# Altium PCB 自控开板V1.PcbDoc
Units mil, origin at the board's own origin, x right, y up, seen from the top; angles counter-clockwise.
Board outline 6000 x 4000 mil, 2 copper layers (Top Layer, Bottom Layer); 103 components, 0 nets, 412 pads, 146 vias.
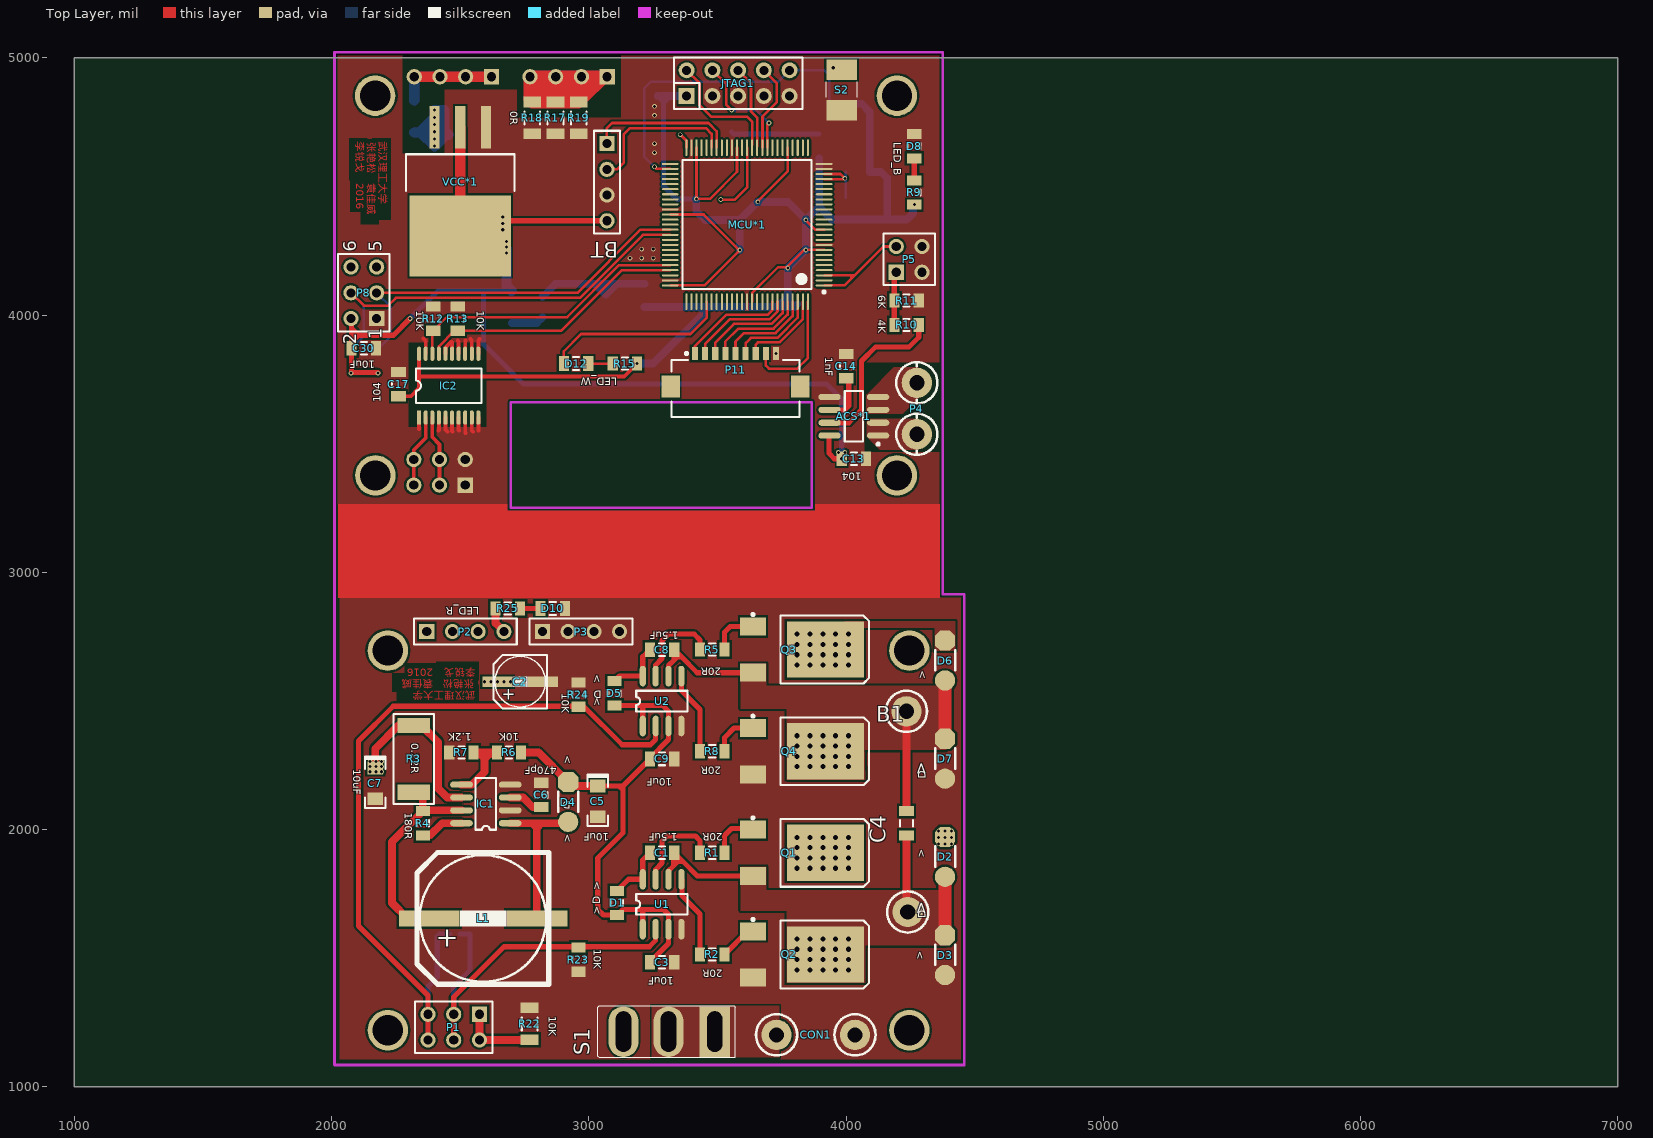
[diagram p0: Top Layer view]
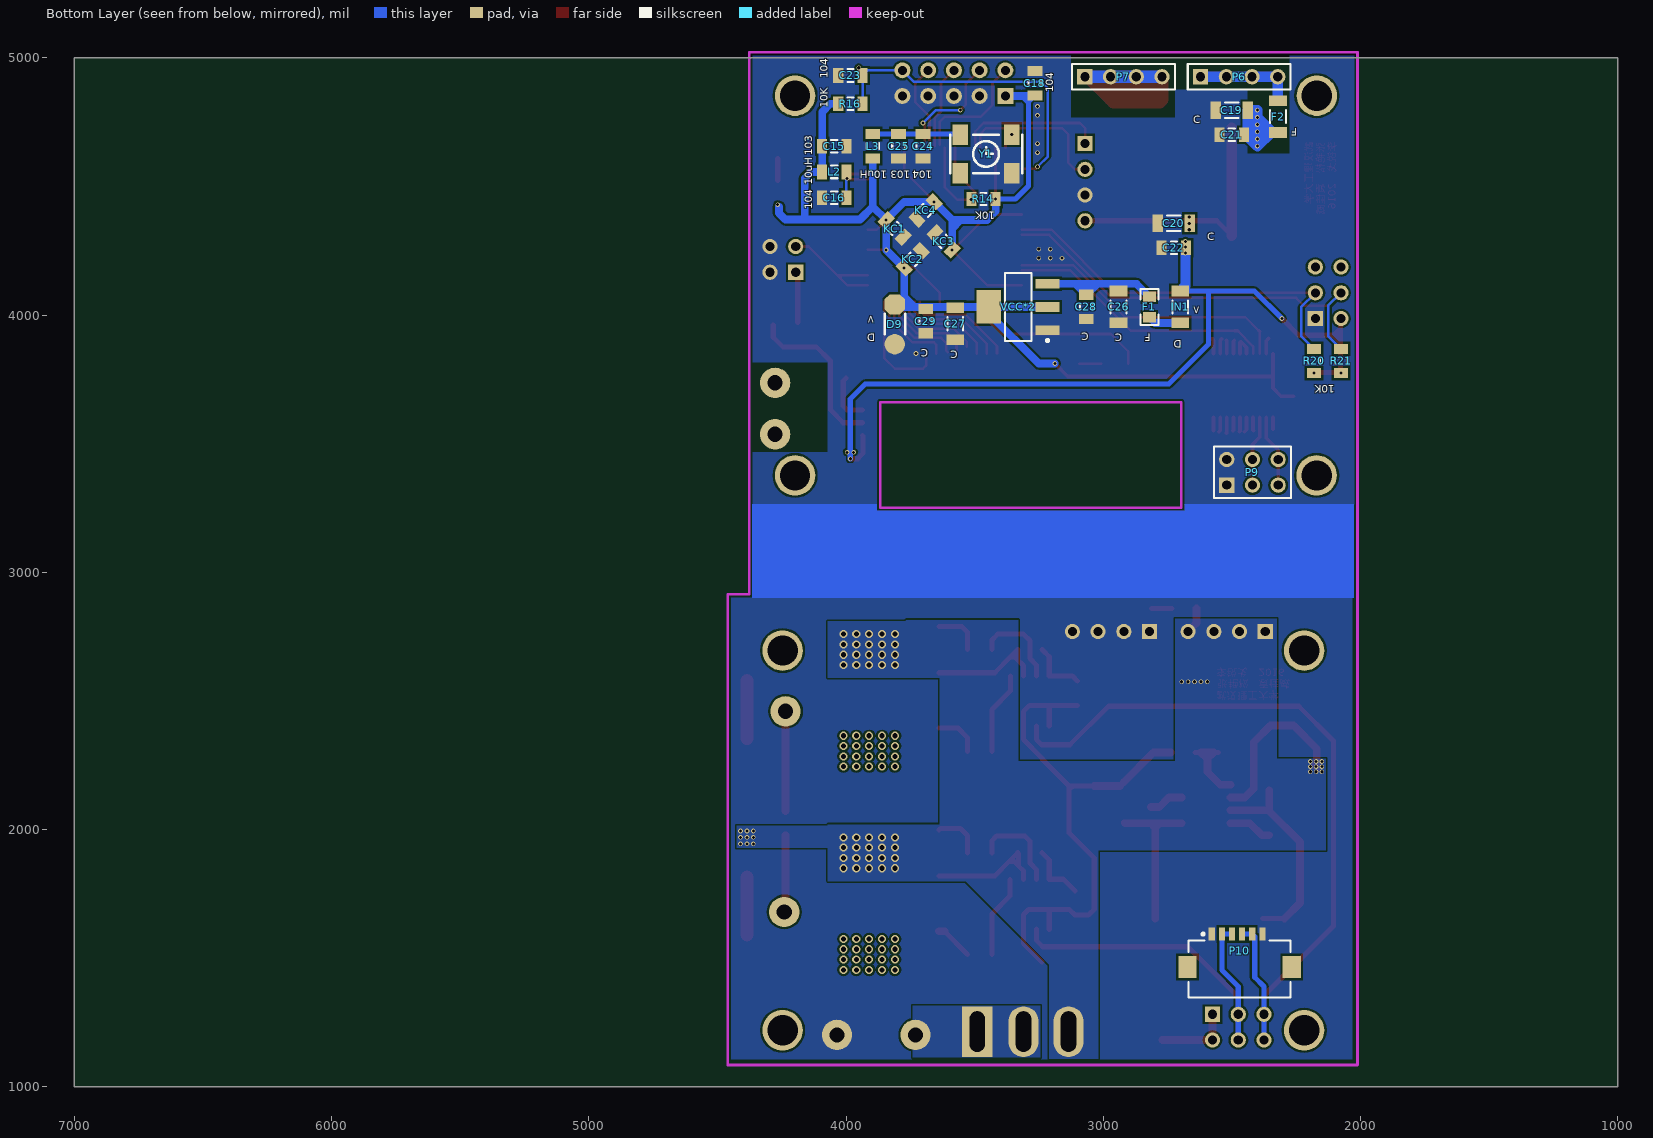
[diagram p1: Bottom Layer view, seen from below]

## Layer stack, top to bottom
Top Layer: signal copper 1.4
Dielectric: dielectric 12.6, FR-4, Dk 4.8
Bottom Layer: signal copper 1.4

## Board outline
1000,1000 7000,1000 7000,5000 1000,5000

## Design rules (kind name [scope] priority, off if disabled: settings)
Clearance [All] p1: gap=10
PolygonConnect [All] p1: connectstyle=Relief reliefconductorwidth=10 reliefentries=4 polygonreliefangle="90 Angle" airgapwidth=10
RoutingVias [All] p1: holewidth=28 width=50 viastyle="Through Hole" minholewidth=28 minwidth=50 maxholewidth=28 maxwidth=50
SolderMaskExpansion [All] p1: expansion=4
Width [All] p1: maxlimit=10 minlimit=10 preferedwidth=10
28 further rules are at their usual default settings.

## Components (designator, comment, footprint, x,y, rotation, side; value= is the part's Value field where it differs from the comment)
ACS*1 "ACS712 AMPSENSOR" "SOIC1-8N ACS712" 4030.55,3607.01 r180 top
B1 "Motor" KF301-2P#1 4235,2185 r0 top
BT "Header 4" HDR1X4 3070.55,4667.01 r270 top
C1 "CAP" C2012 3285,1910 r180 top
C2 "Cap" SMD-EC-F5 2645,2575 r0 top
C3 "Cap Pol1" C2012 3285,1485 r0 top
C4 "Cap" C2012 4235,2025 r90 top
C5 "Cap Pol1" 1206C 3035,2110 r90 top
C6 "Cap" C2012 2815,2135 r270 top
C7 "Cap Pol1" 1206C 2170,2180 r90 top
C8 "Cap" C2012 3285,2700 r180 top
C9 "Cap Pol1" C2012 3285,2275 r0 top
C13 "Cap" C2012 4030.55,3442.01 r180 top
C14 "Cap" C2012 4000.55,3802.01 r90 top
C15 "100nF" C2012 4045.55,4657.01 r0 bottom
C16 "10nF" C2012 4045.55,4457.01 r180 bottom
C17 "100nF" C2012 2260.55,3732.01 r90 top
C18 "100nF" C2012 3265.55,4902.01 r90 bottom
C19 "Cap Pol1" 1206(2) 2500.55,4797.01 r0 bottom
C20 "Cap Pol1" 1206(2) 2725.55,4357.01 r0 bottom
C21 "Cap" C2012 2500.55,4702.01 r180 bottom
C22 "Cap" C2012 2725.55,4262.01 r180 bottom
C23 "100nF" C2012 3982.8,4932.01 r180 bottom
C24 "10nF" C2012 3700.55,4657.01 r90 bottom
C25 "100nF" C2012 3795.55,4657.01 r90 bottom
C26 "Cap Pol1" 1206(2) 2940.55,4032.01 r270 bottom
C27 "Cap Pol1" 1206(2) 3575.55,3967.01 r270 bottom
C28 "Cap" C2012 3065.55,4032.01 r90 bottom
C29 "Cap" C2012 3690.55,3977.01 r90 bottom
C30 "Cap Pol1" C2012 2125.55,3872.01 r0 top
CON1 "PowerIn" KF301-2P#2 3880,1202.2 r90 top
D1 "S4" R2012 3110,1715 r90 top
D2 "SS14" "hole-chip diode" 4425,1816.67 r90 top
D3 "SS14" "hole-chip diode" 4425,1435 r90 top
D4 "SS14" "hole-chip diode" 2960,2030 r90 top
D5 "S4" R2012 3100,2530 r90 top
D6 "SS14" "hole-chip diode" 4425,2580 r90 top
D7 "SS14" "hole-chip diode" 4425,2198.33 r90 top
D8 "POWER" C2012 4265.55,4657.01 r90 top
D9 "1N4729A" "hole-chip diode" 3770.55,3887.01 r90 bottom
D10 "POWER" C2012 2860,2860 r0 top
D12 "POWER" C2012 2950.55,3812.01 r180 top
F1 "300mA" 0805(2012) 2820.55,4032.01 r270 bottom
F2 "500mA" 1206(2) 2320.55,4772.01 r270 bottom
IC1 "MC34063" MC34063 2600,2100 r180 top
IC2 "74LVC245" "74LVC245 TSSOP" 2340.55,3602.01 r90 top
IN1 "1SS355" 1206(2) 2700.55,4032.01 r270 bottom
JTAG1 "Header 5X2" IDC5X2 3580.55,4902.01 r0 top
KC1 "100nF" C2012 3810.55,4337.01 r45 bottom
KC2 "100nF" C2012 3740.55,4217.01 r315 bottom
KC3 "100nF" C2012 3620.55,4287.01 r225 bottom
KC4 "100nF" C2012 3690.55,4407.01 r135 bottom
L1 "Inductor" SMD-EC-F12.5 2380,1655 r0 top
L2 "Inductor" C2012 4045.55,4557.01 r180 bottom
L3 "Inductor" C2012 3895.55,4657.01 r90 bottom
MCU*1 "k60P100" LQFP100 3615.55,4352.01 r180 top
P1 "Header 3X2" HDR2X3 2575,1282.2 r180 top
P2 "Header 4" HDR1X4 2370,2770 r0 top
P3 "Header 4" HDR1X4 2820,2770 r0 top
P4 "Header 2" KF301-2P#3 4275.55,3637.01 r180 top
P5 "Header 2X2" HDR2X2 4195.55,4167.01 r0 top
P6 "Header 4" HDR1X4 2621.5,4927.01 r180 bottom
P7 "Header 4" HDR1X4 3071.5,4927.01 r180 bottom
P8 "Header 3X2" HDR2X3 2175.55,3987.01 r90 top
P9 "Header 3X2" HDR2X3 2519.82,3339.21 r180 bottom
P10 "Header 6" FFC/SM1.0-2H6 2470,1530 r180 bottom
P11 "Header 9" FFC/SM1.0-2H9 3570.55,3787.01 r0 top
Q1 "IR7843" LR7843 3780,1910 r180 top
Q2 "IR7843" LR7843 3780,1515 r180 top
Q3 "IR7843" LR7843 3780,2700 r180 top
Q4 "IR7843" LR7843 3780,2305 r180 top
R1 "Res2" R2012 3480,1910 r0 top
R2 "Res2" R2012 3480,1515 r0 top
R3 "Res2" SK54 2320,2275 r90 top
R4 "Res2" R2012 2355,2025 r90 top
R5 "Res2" R2012 3480,2700 r0 top
R6 "Res2" R2012 2690,2300 r180 top
R7 "Res2" R2012 2505,2300 r0 top
R8 "Res2" R2012 3480,2305 r0 top
R9 "1K" R2012 4265.55,4477.01 r270 top
R10 "注意精度" R2012 4235.55,3962.01 r180 top
R11 "注意精度" R2012 4235.55,4057.01 r180 top
R12 "Res2" R2012 2395.55,3987.01 r90 top
R13 "Res2" R2012 2490.55,3987.01 r90 top
R14 "10K" R2012 3465.55,4452.01 r0 bottom
R15 "1K" R2012 3140.55,3812.01 r0 top
R16 "10K" R2012 3982.8,4822.01 r0 bottom
R17 "Res2" 1206(2) 2870.55,4767.01 r270 top
R18 "Res2" 1206(2) 2780.55,4767.01 r270 top
R19 "Res2" 1206(2) 2960.55,4767.01 r270 top
R20 "Res2" R2012 2180.55,3822.01 r270 bottom
R21 "Res2" R2012 2075.55,3822.01 r90 bottom
R22 "Res2" 1206(2) 2770,1245 r270 top
R23 "Res2" R2012 2960,1495 r90 top
R24 "Res2" R2012 2960,2525 r270 top
R25 "1K" R2012 2685,2860 r180 top
S1 "SW-SPST" SW-125V6A(-) 3490,1215 r180 top
S2 "SW-PB" "sw 3*4 *2" 4042.8,4797.01 r90 top
U1 "IR2104S" IR2104 3285,1710 r90 top
U2 "IR2104S" IR2104 3285,2500 r90 top
VCC*1 "LM1086" "DPAK LM2940" 2500.55,4482.01 r270 top
VCC*2 "LM1086" lm1117 3370.55,4017.01 r180 bottom
Y1 "50MHZ" 贴片有源晶体 3555.55,4552.01 r180 bottom

## Footprints (in the part's own frame and the unit in brackets; to place one, negate y for a bottom-side part, rotate by r counter-clockwise, add the part's x,y. Pads: shape width x height; smd on the part's side, far side on the other; paste and mask are expansions set on the pad)
"74LVC245 TSSOP" [mm]
  rect 1.4x0.4 smd: 1(0,0)
  oval 1.4x0.4 smd: 2(0,-0.65) 3(0,-1.3) 4(0,-1.95) 5(0,-2.6) 6(0,-3.25) 7(0,-3.9) 8(0,-4.55) 9(0,-5.2) 10(0,-5.85) 11(6.3,-5.85) 12(6.3,-5.2) 13(6.3,-4.55) 14(6.3,-3.9) 15(6.3,-3.25) 16(6.3,-2.6) 17(6.3,-1.95) 18(6.3,-1.3) 19(6.3,-0.65) 20(6.3,0)
  silkscreen extent 1.43,-6.18 4.87,0.33
0805(2012) [mil]
  rect 40x50 smd: 1(-40,0) 2(40,0)
  silkscreen extent -70,-35 70,35
1206(2) [mm]
  rect 1.05x1.75 smd: 1(-1.575,0) 2(1.575,0)
  silkscreen extent -0.65,-0.77 0.65,0.77, body extent -1.6,-0.8 1.6,0.8, height 1.6
1206C [mil]
  rect 50x60 smd: 1(60,0) 2(-60,0)
  silkscreen extent -95,-40 105,40
C2012 [mm] "Chip Capacitor, 2-Leads, Body 2.0x1.2mm, IPC Low Density"
  rect 1x1.45 smd: 1(-1.2,0) 2(1.2,0)
  silkscreen extent -0.3,-0.63 0.3,0.63, body extent -0.98,-0.6 1.02,0.6, height 0.5
"DPAK LM2940" [mm] "D2-PAK, 4-Pads, Body 7.93x8.69mm (max), IPC Medium Density"
  rect 4.2x1 smd: 1(-6.3,2.54) 2(-6.3,0) 3(-6.3,-2.54)
  rect 8x10 smd: 4(4.4,0)
  silkscreen extent -3.65,-5.35 0,5.35, body extent -3.65,-5.33 6,5.33, height 4.83
FFC/SM1.0-2H6 [mm] "Connector; FH12 Series; 6 Position; 1.0mm Spaced Bottom Eccentric Contact"
  rect 0.6x1.3 smd: 1(-2.75,1.625) 2(-1.75,1.625) 3(-0.75,1.625) 4(0.25,1.625) 5(1.25,1.625) 6(2.25,1.625)
  rect 1.8x2.2 smd: 7(5.15,-1.625) 8(-5.15,-1.625)
  silkscreen extent -5.05,-4.62 5.05,1.75, body extent -5.05,-4.62 5.05,0.97, height 2
FFC/SM1.0-2H9 [mm] "Connector; FH12 Series; 9 Position; 1.0mm Spaced Bottom Standard Contact"
  rect 0.6x1.3 smd: 1(-4,1.625) 2(-3,1.625) 3(-2,1.625) 4(-1,1.625) 5(0,1.625) 6(1,1.625) 7(2,1.625) 8(3,1.625) 9(4,1.625)
  rect 1.8x2.2 smd: 10(6.4,-1.625) 11(-6.4,-1.625)
  silkscreen extent -6.3,-4.62 6.3,1.75, body extent -6.3,-4.62 6.3,0.97, height 2
HDR1X4 [mm] "Connector; Header; 4 Position"
  rect 1.5x1.5 hole 0.9: 1(0,0)
  round 1.5 hole 0.9: 2(2.54,0) 3(5.08,0) 4(7.62,0)
  silkscreen extent -1.27,-1.27 8.89,1.27, body extent -1.27,-1.27 8.89,1.27, height 7.58
HDR2X2 [mm] "Connector; Header; 2x2 Position"
  rect 1.5x1.5 hole 0.9: 1(0,0)
  round 1.5 hole 0.9: 2(0,2.54) 3(2.54,0) 4(2.54,2.54)
  silkscreen extent -1.27,-1.27 3.81,3.81, body extent -1.27,-1.27 3.81,3.81, height 7.58
HDR2X3 [mm] "Connector; Header; 3x2 Position"
  rect 1.5x1.5 hole 0.9: 1(0,0)
  round 1.5 hole 0.9: 2(0,2.54) 3(2.54,0) 4(2.54,2.54) 5(5.08,0) 6(5.08,2.54)
  silkscreen extent -1.27,-1.27 6.35,3.81
"hole-chip diode" [mm]
  round 2 smd: 1(0,1.016)
  oct 2x2 smd: 2(3.937,1.016)
  silkscreen extent 1,0 3,2
IDC5X2 [mil]
  rect 62x62 hole 35: 1(-200,-50)
  round 62 hole 35: 2(-200,50) 3(-100,-50) 4(-100,50) 5(0,-50) 6(0,50) 7(100,-50) 8(100,50) 9(200,-50) 10(200,50)
  silkscreen extent -250,-100 250,100
IR2104 [mil]
  oval 80x23.62 smd: 1(-97,75) 2(-97,25) 3(-97,-25) 4(-97,-75) 5(97,-75) 6(97,-25) 7(97,25) 8(97,75)
  silkscreen extent -40,-98 40,100
KF301-2P#1 [mm]
  round 3 hole 1.5: 1(0.127,-12.827) 2(0,6.985)
  silkscreen extent -2.03,-14.86 2.16,9.02
KF301-2P#2 [mm]
  round 3 hole 1.5: 1(0,-3.937) 2(0,3.81)
  silkscreen extent -2.03,-5.97 2.03,5.84
KF301-2P#3 [mm]
  round 3 hole 1.5: 1(0,-2.54) 2(0,2.54)
  silkscreen extent -2.03,-4.57 2.03,4.57
lm1117 [mm]
  rect 2.4x0.95 smd: 1(3.916,-1.919) 2(3.916,0.381) 3(3.916,2.681)
  rect 2.4x3.3 smd: 4(-1.884,0.381)
  silkscreen extent -0.28,-3.07 4.04,3.73, body extent -0.83,-2.97 2.87,3.73, height 1.8
LQFP100 [mm] "SQFP, 100-Leads, Body 14.00x14.00mm, Pitch 0.50mm, IPC Medium Density"
  oval 1.65x0.2 smd: 1(-7.6,6) 2(-7.6,5.5) 3(-7.6,5) 4(-7.6,4.5) 5(-7.6,4) 6(-7.6,3.5) 7(-7.6,3) 8(-7.6,2.5) 9(-7.6,2) 10(-7.6,1.5) 11(-7.6,1) 12(-7.6,0.5) 13(-7.6,0) 14(-7.6,-0.5) 15(-7.6,-1) 16(-7.6,-1.5) 17(-7.6,-2) 18(-7.6,-2.5) 19(-7.6,-3) 20(-7.6,-3.5) 21(-7.6,-4) 22(-7.6,-4.5) 23(-7.6,-5) 24(-7.6,-5.5) 25(-7.6,-6) 51(7.6,-6) 52(7.6,-5.5) 53(7.6,-5) 54(7.6,-4.5) 55(7.6,-4) 56(7.6,-3.5) 57(7.6,-3) 58(7.6,-2.5) 59(7.6,-2) 60(7.6,-1.5) 61(7.6,-1) 62(7.6,-0.5) 63(7.6,0) 64(7.6,0.5) 65(7.6,1) 66(7.6,1.5) 67(7.6,2) 68(7.6,2.5) 69(7.6,3) 70(7.6,3.5) 71(7.6,4) 72(7.6,4.5) 73(7.6,5) 74(7.6,5.5) 75(7.6,6)
  oval 0.2x1.65 smd: 26(-6,-7.6) 27(-5.5,-7.6) 28(-5,-7.6) 29(-4.5,-7.6) 30(-4,-7.6) 31(-3.5,-7.6) 32(-3,-7.6) 33(-2.5,-7.6) 34(-2,-7.6) 35(-1.5,-7.6) 36(-1,-7.6) 37(-0.5,-7.6) 38(0,-7.6) 39(0.5,-7.6) 40(1,-7.6) 41(1.5,-7.6) 42(2,-7.6) 43(2.5,-7.6) 44(3,-7.6) 45(3.5,-7.6) 46(4,-7.6) 47(4.5,-7.6) 48(5,-7.6) 49(5.5,-7.6) 50(6,-7.6) 76(6,7.6) 77(5.5,7.6) 78(5,7.6) 79(4.5,7.6) 80(4,7.6) 81(3.5,7.6) 82(3,7.6) 83(2.5,7.6) 84(2,7.6) 85(1.5,7.6) 86(1,7.6) 87(0.5,7.6) 88(0,7.6) 89(-0.5,7.6) 90(-1,7.6) 91(-1.5,7.6) 92(-2,7.6) 93(-2.5,7.6) 94(-3,7.6) 95(-3.5,7.6) 96(-4,7.6) 97(-4.5,7.6) 98(-5,7.6) 99(-5.5,7.6) 100(-6,7.6)
  silkscreen extent -7.73,-6.38 6.38,6.77, body extent -7,-7 7,7, height 1.7
LR7843 [mm]
  rect 2.54x1.778 smd: 1(3.6,-2.28) 3(3.6,2.28)
  rect 7.6x5.55 smd: 2(-3.556,0)
  silkscreen extent -7.87,-3.58 3.72,3.35
MC34063 [mm]
  oval 2.25x0.6 smd: 1(-2.4,1.905) 2(-2.4,0.635) 3(-2.4,-0.635) 4(-2.4,-1.905) 5(2.4,-1.905) 6(2.4,-0.635) 7(2.4,0.635) 8(2.4,1.905)
  silkscreen extent -1.02,-2.55 1.02,2.55
R2012 [mm] "Chip Resistor, 2-Leads, Body 2.0x1.2mm, IPC Low Density"
  rect 1x1.4 smd: 1(-1.2,0) 2(1.2,0)
  silkscreen extent -0.3,-0.6 0.3,0.6, body extent -0.98,-0.6 1.02,0.6, height 0.5
SK54 [mm]
  rect 1.52x3.18 smd: A(-3.305,0) K(3.305,0)
  silkscreen extent -4.43,-2 4.43,2.01
SMD-EC-F5 [mm]
  rect 3x1 smd: 1(0,0) 2(4.477,0)
  silkscreen extent -0.41,-2.65 4.89,2.66
SMD-EC-F12.5 [mm]
  rect 6x1.6 smd: 1(0,0) 2(10.625,0)
  silkscreen extent -1.2,-6.5 11.8,6.49
"SOIC1-8N ACS712" [mm]
  oval 2.2x0.6 smd: 1(-2.4,1.905) 2(-2.4,0.635) 3(-2.4,-0.635) 4(-2.4,-1.905) 5(2.4,-1.905) 6(2.4,-0.635) 7(2.4,0.635) 8(2.4,1.905)
  silkscreen extent -2.53,-2.5 0.9,2.88, body extent -2,-2.5 2,2.5, height 1.75
"sw 3*4 *2" [mm]
  rect 2x3 smd: 1(0,1.524) 2(4,1.524)
  silkscreen extent 1.27,0 2.79,3.05
SW-125V6A(-) [mm]
  rect 3x5 hole 1.5 slot 4 at 90 deg: 0(0,0)
  oval 3x5 hole 1.5 slot 4 at 90 deg: 1(4.572,0) 2(9.017,0)
  silkscreen extent -2.03,-2.54 11.56,2.54
贴片有源晶体 [mil]
  rect 60x80 smd: 1(0,0) 2(200,0) 3(200,150) 4(0,150)
  silkscreen extent -40,0 240,150, body extent -37,-23 238,173, height 74

## Part data
B1: library part "Motor Servo", "Servo Motor"
BT P2 P3 P6 P7: "Header, 4-Pin"
C1 C15 C16 C17 C18 C23 C24 C25 KC1 KC2 KC3 KC4: library part Cap, "Capacitor"
C2: library part CAP+
C3 C5 C7 C9 C19 C20 C26 C27 C30: "Polarized Capacitor (Radial)"
C4 C6 C8 C13 C14: "Capacitor"
C21 C22 C28 C29: "贴片电容"
CON1: library part "Header 2", "Header, 2-Pin"
D1 D2 D3 D4 D5 D6 D7: library part "Diode 1N4007", "1 Amp General Purpose Rectifier"
D8 D10 D12: library part LED, "Typical INFRARED GaAs LED"
D9 IN1: library part "Diode 1N4148", "High Conductance Fast Diode"
F1 F2: library part "Fuse 1", "Fuse"
JTAG1: "Header, 5-Pin, Dual row"
P1 P8 P9: "Header, 3-Pin, Dual row"
P4: "Header, 2-Pin"
P5: "Header, 2-Pin, Dual row"
P10: "Header, 6-Pin"
P11: "Header, 9-Pin"
Q1 Q2 Q3 Q4: library part NMOS-2, "N-Channel Power MOSFET"
R1 R2 R3 R4 R5 R6 R7 R8 R12 R13 R17 R18 R19 R20 R21 R22 R23 R24: "Resistor"
R9 R14 R15 R25: library part Res, "Resistor of led"
R10 R11: library part Res2, "Resistor"
R16: library part Res, "Resistor"
S1: "Single-Pole, Single-Throw Switch"
S2: "Switch"
U1 U2: library part Component_1_1
Y1: library part XTAL1

## Free pads (board coordinates)
  round 157.48 hole 118.11: 0(2170.55,3377.01) 0(2219.06,1220) 1(4198.11,3377.01) 1(4246.61,1220) 2(2169.61,4853.39) 2(2219.06,2696.38) 3(4198.11,4853.39) 3(4246.61,2696.38)

## Via types
v1: diameter 31.5, hole 19.68, Top Layer to Bottom Layer, 80 vias
v2: diameter 18, hole 12, Top Layer to Bottom Layer, 66 vias

## Nets (pads, with @x,y where several pads share a name; then routed paths per layer and width w, separated by ;. In a path a pad name is that pad's centre, name@x,y a point inside that pad or via, vN(x,y) a via of type N, cw(c..) or ccw(c..) an arc to the next point about the centre after c; other vN are vias at no path point)
pads on no net: ACS*1.1 ACS*1.2 ACS*1.3 ACS*1.4 ACS*1.5 ACS*1.6 ACS*1.7 ACS*1.8 B1.1 B1.2 BT.1 BT.2 BT.3 BT.4 C1.1 C1.2 C2.1 C2.2 C3.1 C3.2 C4.1 C4.2 C5.1 C5.2 C6.1 C6.2 C7.1 C7.2 C8.1 C8.2 C9.1 C9.2 C13.1 C13.2 C14.1 C14.2 C15.1 C15.2 C16.1 C16.2 C17.1 C17.2 C18.1 C18.2 C19.1 C19.2 C20.1 C20.2 C21.1 C21.2 C22.1 C22.2 C23.1 C23.2 C24.1 C24.2 C25.1 C25.2 C26.1 C26.2 C27.1 C27.2 C28.1 C28.2 C29.1 C29.2 C30.1 C30.2 CON1.1 CON1.2 D1.1 D1.2 D2.1 D2.2 D3.1 D3.2 D4.1 D4.2 D5.1 D5.2 D6.1 D6.2 D7.1 D7.2 D8.1 D8.2 D9.1 D9.2 D10.1 D10.2 D12.1 D12.2 F1.1 F1.2 F2.1 F2.2 IC1.1 IC1.2 IC1.3 IC1.4 IC1.5 IC1.6 IC1.7 IC1.8 IC2.1 IC2.2 IC2.3 IC2.4 IC2.5 IC2.6 IC2.7 IC2.8 IC2.9 IC2.10 IC2.11 IC2.12 IC2.13 IC2.14 IC2.15 IC2.16 IC2.17 IC2.18 IC2.19 IC2.20 IN1.1 IN1.2 JTAG1.1 JTAG1.2 JTAG1.3 JTAG1.4 JTAG1.5 JTAG1.6 JTAG1.7 JTAG1.8 JTAG1.9 JTAG1.10 KC1.1 KC1.2 KC2.1 KC2.2 KC3.1 KC3.2 KC4.1 KC4.2 L1.1 L1.2 L2.1 L2.2 L3.1 L3.2 MCU*1.1 MCU*1.2 MCU*1.3 MCU*1.4 MCU*1.5 MCU*1.6 MCU*1.7 MCU*1.8 MCU*1.9 MCU*1.10 MCU*1.11 MCU*1.12 MCU*1.13 MCU*1.14 MCU*1.15 MCU*1.16 MCU*1.17 MCU*1.18 MCU*1.19 MCU*1.20 MCU*1.21 MCU*1.22 MCU*1.23 MCU*1.24 MCU*1.25 MCU*1.26 MCU*1.27 MCU*1.28 MCU*1.29 MCU*1.30 MCU*1.31 MCU*1.32 MCU*1.33 MCU*1.34 MCU*1.35 MCU*1.36 MCU*1.37 MCU*1.38 MCU*1.39 MCU*1.40 MCU*1.41 MCU*1.42 MCU*1.43 MCU*1.44 MCU*1.45 MCU*1.46 MCU*1.47 MCU*1.48 MCU*1.49 MCU*1.50 MCU*1.51 MCU*1.52 MCU*1.53 MCU*1.54 MCU*1.55 MCU*1.56 MCU*1.57 MCU*1.58 MCU*1.59 MCU*1.60 MCU*1.61 MCU*1.62 MCU*1.63 MCU*1.64 MCU*1.65 MCU*1.66 MCU*1.67 MCU*1.68 MCU*1.69 MCU*1.70 MCU*1.71 MCU*1.72 MCU*1.73 MCU*1.74 MCU*1.75 MCU*1.76 MCU*1.77 MCU*1.78 MCU*1.79 MCU*1.80 MCU*1.81 MCU*1.82 MCU*1.83 MCU*1.84 MCU*1.85 MCU*1.86 MCU*1.87 MCU*1.88 MCU*1.89 MCU*1.90 MCU*1.91 MCU*1.92 MCU*1.93 MCU*1.94 MCU*1.95 MCU*1.96 MCU*1.97 MCU*1.98 MCU*1.99 MCU*1.100 P1.1 P1.2 P1.3 P1.4 P1.5 P1.6 P2.1 P2.2 P2.3 P2.4 P3.1 P3.2 P3.3 P3.4 P4.1 P4.2 P5.1 P5.2 P5.3 P5.4 P6.1 P6.2 P6.3 P6.4 P7.1 P7.2 P7.3 P7.4 P8.1 P8.2 P8.3 P8.4 P8.5 P8.6 P9.1 P9.2 P9.3 P9.4 P9.5 P9.6 P10.1 P10.2 P10.3 P10.4 P10.5 P10.6 P10.7 P10.8 P11.1 P11.2 P11.3 P11.4 P11.5 P11.6 P11.7 P11.8 P11.9 P11.10 P11.11 Q1.1 Q1.2 Q1.3 Q2.1 Q2.2 Q2.3 Q3.1 Q3.2 Q3.3 Q4.1 Q4.2 Q4.3 R1.1 R1.2 R2.1 R2.2 R3.A R3.K R4.1 R4.2 R5.1 R5.2 R6.1 R6.2 R7.1 R7.2 R8.1 R8.2 R9.1 R9.2 R10.1 R10.2 R11.1 R11.2 R12.1 R12.2 R13.1 R13.2 R14.1 R14.2 R15.1 R15.2 R16.1 R16.2 R17.1 R17.2 R18.1 R18.2 R19.1 R19.2 R20.1 R20.2 R21.1 R21.2 R22.1 R22.2 R23.1 R23.2 R24.1 R24.2 R25.1 R25.2 S1.0 S1.1 S1.2 S2.1 S2.2 U1.1 U1.2 U1.3 U1.4 U1.5 U1.6 U1.7 U1.8 U2.1 U2.2 U2.3 U2.4 U2.5 U2.6 U2.7 U2.8 VCC*1.1 VCC*1.2 VCC*1.3 VCC*1.4 VCC*2.1 VCC*2.2 VCC*2.3 VCC*2.4 Y1.1 Y1.2 Y1.3 Y1.4
copper on no net: | length 47023
  Top Layer w10: 2075.55,4087.01 2125.55,4037.01 2220.55,4037.01 2250.55,4067.01 2965.1,4067.01 3210.73,4312.64 3316.34,4312.64 ; 2175.55,4087.01 2955.55,4087.01 3200.87,4332.32 3316.34,4332.32 ; 2391.73,3850.04 2391.73,3935.95 ; 2395.55,3939.76 2447.8,3992.01 2915.55,3992.01 3118.07,4194.53 3316.34,4194.53 ; 2417.32,3850.04 2417.32,3878.78 2478.31,3939.76 ; 2490.55,3939.76 2893.31,3939.76 3128.39,4174.84 3316.34,4174.84 ; 2903.31,3812.01 2903.31,3859.76 2970.55,3927.01 3395.55,3927.01 3458.07,3989.53 3458.07,4052.8 ; 3007.8,3812.01 3093.31,3812.01 ; 3070.55,4567.01 3110.55,4567.01 3135.55,4592.01 3135.55,4702.01 3160.55,4727.01 3455.55,4727.01 3477.76,4704.8 3477.76,4651.22 ; 3070.55,4667.01 3070.55,4727.01 3090.55,4747.01 3465.55,4747.01 3497.44,4715.12 3497.44,4651.22 ; v2(3255.55,4577.01) 3264.02,4568.54 3316.34,4568.54 ; 3316.34,4115.79 3449.33,4115.79 3585.55,4252.01 3446.18,4391.38 3316.34,4391.38 ; 3380.55,4952.01 3430.55,4902.01 3430.55,4817.01 3475.55,4772.01 3615.55,4772.01 3635.35,4752.2 3635.35,4662.01 ; 3413.07,3850.98 3413.07,3879.53 3535.55,4002.01 3696,4002.01 3713.98,4019.98 3713.98,4052.8 ; 3418.7,4651.22 3418.7,4453.86 3420.55,4452.01 3470.55,4452.01 3576.18,4557.64 3576.18,4651.22 ; 3452.44,3850.98 3452.44,3888.9 3547.55,3984.01 3703.46,3984.01 3733.66,4014.21 3733.66,4052.8 ; 3480.55,4952.01 3534.55,4898.01 3534.55,4818.01 v2(3555.55,4797.01) ; 3491.81,3850.98 3491.81,3893.27 3564.55,3966.01 3710.91,3966.01 3753.35,4008.44 3753.35,4052.8 ; v2(3513.05,4449.51) 3568.05,4449.51 3615.55,4497.01 3615.55,4651.22 ; 3530.55,3877.01 3530.55,3897.01 3581.55,3948.01 3718.37,3948.01 3773.03,4002.67 3773.03,4052.8 ; 3570.55,3850.98 3570.55,3897.01 3603.55,3930.01 3725.82,3930.01 3792.72,3996.9 3792.72,4052.8 ; 3580.55,4952.01 3630.55,4902.01 3630.55,4792.01 3655.35,4767.2 3655.35,4657.01 ; 3604.53,3855.98 3610.55,3862.01 3610.55,3892.01 3630.55,3912.01 3733.28,3912.01 3812.4,3991.13 3812.4,4052.8 ; 3635.24,4052.8 3635.24,4085.61 3736.64,4187.01 3770.55,4187.01 3837.13,4253.58 3914.76,4253.58 ; 3649.29,3850.98 3649.29,3885.75 3657.55,3894.01 3740.73,3894.01 3832.09,3985.36 3832.09,4052.8 ; v2@3655.55,4442.01 3773.03,4559.49 3773.03,4651.22 ; 3675.35,4651.97 3675.35,4771.81 3730.55,4827.01 3730.55,4902.01 3680.55,4952.01 ; 3688.66,3850.98 3688.66,3803.9 3700.55,3792.01 3810.55,3792.01 3851.77,3833.23 3851.77,4052.8 ; 3694.29,4651.22 3694.29,4740.75 v2(3700.55,4747.01) ; v2@3840.55,4372.01 3880.24,4332.32 3914.76,4332.32 ; 3914.76,4115.79 3994.33,4115.79 4020.55,4142.01 ; 3914.76,4155.16 4015.55,4155.16 ; 3914.76,4529.17 3992.72,4529.17 v2(3995.55,4532.01) 3978.7,4548.86 3914.76,4548.86 ; 4195.55,4267.01 4145.55,4267.01 4033.7,4155.16 ; 4015.55,4155.16 4020.55,4150.16 4020.55,4142.01 ; 4015.55,4155.16 4033.7,4155.16 ; 4020.55,4142.01 4033.7,4155.16
  Top Layer w11: v2(3355.55,4702.01) 3379.33,4678.23 3379.33,4651.22
  Top Layer w15: 2260.55,3684.76 2308.31,3684.76 2340.55,3717.01 2340.55,3762.01 ; 2319.82,3339.21 2319.82,3439.21 2319.82,3476.28 2366.14,3522.6 2366.14,3602.01 ; 2340.55,3557.01 2340.55,3602.01 ; 2340.55,3850.04 2340.55,3762.01 ; 2357.03,3909.12 2366.14,3900.01 2366.14,3850.04 ; 2391.73,3602.01 2391.73,3525.83 2419.82,3497.74 2419.82,3439.21 2419.82,3339.21 ; 2391.73,3935.95 2395.55,3939.76 ; 2415.55,3552.01 2417.32,3553.78 2417.32,3602.01 ; 2442.91,3602.01 2442.91,3554.65 2450.55,3547.01 ; 2442.91,3850.04 2442.91,3874.37 2465.55,3897.01 2468.5,3894.05 2468.5,3850.04 ; 2468.5,3602.01 2468.5,3549.05 2470.55,3547.01 ; 2478.31,3939.76 2490.55,3939.76 ; 2490.55,3902.01 2494.09,3898.46 2494.09,3850.04 ; 2494.09,3602.01 2494.09,3553.46 2495.55,3552.01 ; 2519.69,3602.01 2519.69,3542.87 2520.55,3542.01 ; 2519.69,3850.04 2519.69,3901.14 2520.55,3902.01 ; 2540.55,3907.01 2545.28,3902.28 2545.28,3850.04 ; 2545.28,3602.01 2545.28,3552.28 2550.55,3547.01 ; 2570.55,3552.01 2570.87,3552.32 2570.87,3602.01 ; 2570.87,3850.04 2570.87,3902.32 2575.55,3907.01 ; v2@3187.8,3812.01 3137.8,3762.01 2340.55,3762.01
  Top Layer w20: 2075.55,3987.01 2078.31,3984.25 2078.31,3949.25 ; v2@2170,2240 v2@2177.24,2247.24 ; v2@2180.55,3777.01 2080.55,3777.01 2078.31,3779.25 2078.31,3872.01 2078.31,3894.76 ; 2295,1655 2380,1655 ; v2(2305.55,3987.01) 2240.55,3922.01 2105.55,3922.01 ; 2355,2072.24 2357.76,2075 ; 2375,1182.2 2375,1282.2 2375,1355 2105,1625 2105,2345 2240,2480 2980,2480 3130,2330 3240,2330 3260,2350 3260,2403 ; 2475,1182.2 2475,1282.2 2475,1350 2670,1545 3235,1545 3260,1570 3260,1613 ; 2500.55,4308.78 2558.78,4367.01 3070.55,4367.01 ; 2552.24,2300 2570,2300 ; 2595,2295 2600,2300 ; 2620,2300 2642.76,2300 ; 2732.24,2860 2812.76,2860 ; 2770,2025 2773.32,2025 2798.32,2000 ; 2800,2025 2798.32,2023.32 2798.32,2000 ; 2823.32,2025 2798.32,2000 ; 2915,2025 2920,2030 ; 2920,2185 2935,2170 ; 3035,2170 3117.76,2170 ; 3100,2482.76 3210,2482.76 ; 3100,2577.24 3119.76,2597 3210,2597 3210,2672.24 3237.76,2700 ; 3110,1762.24 3154.76,1807 3210,1807 3210,1882.24 3237.76,1910 ; 3110,2170 3117.76,2170 ; 3210,1613 3210,1690 ; 3210,2403 3210,2482.76 ; 3237.76,1485 3310,1557.24 3310,1613 3310,1670 3290,1690 3210,1690 ; 3260,1807 3260,1845 3285,1870 3285,1955 3305,1975 3415,1975 3432.76,1957.24 3432.76,1910 ; 3260,2597 3260,2640 3285,2665 3285,2735 3310,2760 3410,2760 3432.76,2737.24 3432.76,2700 ; 3310,1807 3310,1840 3330,1860 ; 3310,2597 3310,2637.76 3332.24,2660 ; 3360,2597 3360,2540 3432.76,2467.24 3432.76,2305 ; 3362,1805 3362,1743 3432.76,1672.24 3432.76,1515 ; 3527.24,1515 3617.01,1604.76 ; 3527.24,1910 3527.24,1977.24 3555,2005 3633.03,2005 3638.27,1999.76 ; 3527.24,2305 3527.24,2357.24 3564.76,2394.76 3638.27,2394.76 ; 3527.24,2700 3527.24,2767.24 3549.76,2789.76 3638.27,2789.76 ; 3638.27,1820.24 3422.01,1820.24 3365,1877.24 ; 3638.27,2610.24 3422.01,2610.24 3361.12,2671.12 ; 3936.06,3532.01 3934.5,3530.44 3934.5,3462.01 3954.5,3442.01 v2(3983.31,3442.01) ; 3936.06,3582.01 4010.55,3582.01 4060.55,3632.01 4060.55,3822.01 4115.55,3877.01 4245.55,3877.01 4282.8,3914.25 4282.8,3962.01 ; 3936.06,3632.01 3995.55,3632.01 4010.55,3647.01 4010.55,3744.76 4000.55,3754.76 ; 4187.8,3972.01 4187.8,4062.01 4187.8,4159.25 4195.55,4167.01 ; 4265.55,4524.25 4265.55,4609.76 ; 2078.31,3894.76 2078.31,3922.01 ; 2078.31,3894.76 2105.55,3922.01 ; 2078.31,3922.01 2078.31,3949.25 ; 2078.31,3922.01 2105.55,3922.01 ; 2078.31,3949.25 2105.55,3922.01 ; 3117.76,2170 3132.76,2170 ; 3117.76,2170 3132.76,2155 ; 3132.76,2155 3132.76,1987.76 3035,1890 3035,1690 3057.24,1667.76 3110,1667.76 3132.24,1690 3210,1690 ; 3132.76,2155 3132.76,2170 ; 3132.76,2170 3237.76,2275 3237.76,2277.76 3310,2350 3310,2403 3310,2460 3287.24,2482.76 3210,2482.76 ; 3330,1860 3347.24,1877.24 3365,1877.24 ; 3330,1860 3330,1907.76 3332.24,1910 3365,1877.24 ; 3332.24,2660 3343.37,2671.12 3361.12,2671.12 ; 3332.24,2660 3332.24,2700 3361.12,2671.12
  Top Layer w30: v2@2170,2240 2170,2315 2260.12,2405.12 2320,2405.12 2349.88,2405.12 2415.07,2339.93 2415.07,2159.93 2450,2125 2505.51,2125 ; v2@2172.5,2247.24 v2@2177.24,2247.24 ; 2295,1655 2235,1715 2235,1952.24 2355,2072.24 2355,2152.76 ; 2355,1977.76 2382.76,1977.76 2430,2025 2505.51,2025 ; 2357.76,2075 2505.51,2075 ; 2505.51,2175 2545,2175 2595,2225 2595,2275 ; 2575,1282.2 2575,1182.2 2770,1182.2 2770,1182.99 ; 2595,2295 2595,2275 ; 2637.76,2860 2637.76,2802.24 2670,2770 ; 2694.49,2025 2773.32,2025 2800,2025 2823.32,2025 2915,2025 ; 2694.49,2125 2745,2125 2782.24,2087.76 2815,2087.76 ; 2737.24,2300 2805,2300 2920,2185 ; 2798.32,1655 2798.32,2000 ; 2935,2170 3035,2170 ; 3617.01,1604.76 3638.27,1604.76 ; 4235,1977.76 4235,1680 4240,1680 ; 4235,2072.24 4235,2460 ; 2595,2275 2570,2300 2600,2300 2620,2300 2595,2275
  Top Layer w40: 2321.5,4927.01 2421.5,4927.01 2521.5,4927.01 2621.5,4927.01 ; 2500.55,4308.78 2500.55,4730.04
  Top Layer w50: 2830.55,4862.01 2845.55,4877.01 2871.5,4877.01 ; 3071.5,4927.01 3058.54,4927.01 ; 4385,1590 4385,1816.67 ; 4385,2353.33 4385,2580 ; 2771.5,4892.01 2871.5,4892.01 ; 2771.5,4892.01 2834.49,4829.02 ; 2771.5,4892.01 2771.5,4927.01 2871.5,4927.01 ; 2771.5,4892.01 2771.5,4838.07 2780.55,4829.02 2834.49,4829.02 ; 2834.49,4829.02 2870.55,4829.02 ; 2870.55,4829.02 2960.55,4829.02 2971.5,4839.96 ; 2870.55,4829.02 2871.5,4829.96 2871.5,4877.01 ; 2871.5,4877.01 2871.5,4892.01 ; 2871.5,4877.01 2950.55,4877.01 2935.55,4892.01 2871.5,4892.01 ; 2871.5,4892.01 2871.5,4927.01 ; 2871.5,4927.01 2971.5,4927.01 ; 2971.5,4839.96 2971.5,4927.01 ; 2971.5,4839.96 3058.54,4927.01 ; 2971.5,4927.01 3058.54,4927.01
  Bottom Layer w10: 2075.55,3869.25 2125.55,3919.25 2125.55,4037.01 2075.55,4087.01 ; 2175.55,4087.01 2230.55,4032.01 2230.55,3919.25 2180.55,3869.25 ; v2(3255.55,4577.01) 3215.55,4617.01 3215.55,4882.01 3240.55,4907.01 3735.55,4907.01 3780.55,4952.01 3915.55,4952.01 3935.55,4932.01 ; v2(3555.55,4797.01) 3650.55,4797.01 v2(3700.55,4747.01) ; 3935.55,4822.01 3935.55,4932.01 ; v2(3950.55,4962.01) 3950.55,4947.01 3935.55,4932.01 ; 3998.31,4457.01 3998.31,4557.01
  Bottom Layer w20: v2(2305.55,3987.01) 2412.56,4094.02 2700.55,4094.02 ; 2375,1182.2 2375,1282.2 2375,1390 2411.23,1426.23 2411.23,1584.42 2420.79,1593.98 2460.16,1593.98 ; 2475,1182.2 2475,1282.2 2475,1390 2538.9,1453.9 2538.9,1593.98 2499.53,1593.98 ; 2590.55,4094.02 2590.55,3887.01 2745.55,3732.01 3925.55,3732.01 3983.31,3674.25 v2(3983.31,3442.01) ; 3320.55,4852.01 3315.55,4852.01 3290.55,4827.01 ; v2(3418.31,4452.01) 3340.55,4452.01 3290.55,4502.01 3290.55,4827.01 ; 3555.55,4712.01 3563.31,4704.25 3700.55,4704.25 3795.55,4704.25 3895.55,4704.25 ; 3290.55,4827.01 3290.55,4829.76 ; 3290.55,4829.76 3290.55,4852.01 3287.8,4854.76 3265.55,4854.76 3268.31,4852.01 3290.55,4829.76
  Bottom Layer w30: 2700.55,3970 2798.54,3970 2820.55,3992.01 ; 2820.55,4072.01 2871.1,4122.56 3022.24,4122.56 ; 2995.55,4122.56 3022.24,4122.56 ; v2(3188.31,3812.01) 3250.55,3812.01 3444.72,4006.18 3444.72,4032.01 ; 3216.38,4032.01 3444.72,4032.01 ; 3216.38,4122.56 3108.86,4122.56 ; 3268.31,4852.01 3290.55,4852.01 3315.55,4852.01 ; 3320.55,4852.01 3380.55,4852.01 ; v2(3418.31,4452.01) 3418.31,4404.25 3452.14,4370.41 3555.55,4370.41 ; v2(3587.14,4253.6) 3587.14,4337.01 ; 3810.55,4042.01 3800.55,4032.01 3765.55,4032.01 ; 3895.55,4609.76 3895.55,4422.01 ; 4030.04,4822.01 4060.55,4822.01 4092.8,4789.76 4092.8,4657.01 4092.8,4557.01 4135.55,4557.01 4160.55,4532.01 4160.55,4372.01 ; 4260.55,4422.01 4260.55,4397.01 4235.55,4372.01 3945.55,4372.01 3895.55,4422.01 ; 3022.24,4122.56 3065.55,4079.25 ; 3022.24,4122.56 3060.55,4122.56 ; 3060.55,4122.56 3065.55,4117.56 3065.55,4079.25 ; 3060.55,4122.56 3108.86,4122.56 ; 3065.55,4079.25 3108.86,4122.56 ; 3444.72,4032.01 3735.55,4032.01 ; 3555.55,4370.41 3555.55,4368.6 3587.14,4337.01 ; 3555.55,4370.41 3587.14,4370.41 ; 3587.14,4337.01 3587.14,4370.41 ; 3587.14,4370.41 v2(3657.14,4440.41) 3773.96,4440.41 v2(3843.96,4370.41) ; 3735.55,4032.01 3770.55,4067.01 3773.96,4067.01 ; 3735.55,4032.01 3765.55,4032.01 ; 3765.55,4032.01 3773.96,4040.41 3773.96,4067.01 ; 3773.96,4067.01 v2(3773.96,4183.6) v2(3843.96,4253.6) v2(3843.96,4370.41) ; v2(3843.96,4370.41) 3895.55,4422.01
  Bottom Layer w40: 2320.55,4710 2341.54,4710 ; 2321.5,4834.96 2321.5,4927.01 2421.5,4927.01 2521.5,4927.01 2621.5,4927.01 ; v2@2678.31,4262.01 2680.55,4259.76 v2(2680.55,4242.01) 2680.55,4114.02 2700.55,4094.02 ; 2341.54,4710 2347.56,4710 ; 2341.54,4710 v2(2400.55,4769.01) ; 2347.56,4710 v2@2400.55,4710 ; 2347.56,4710 v2(2400.55,4657.01) ; v2(2400.55,4657.01) v2(2400.55,4685.01) v2@2400.55,4710 ; v2(2400.55,4657.01) 2445.55,4702.01 2453.31,4702.01 2445.32,4710 ; v2@2400.55,4710 v2(2400.55,4713.01) v2(2400.55,4741.01) v2(2400.55,4769.01) ; v2@2400.55,4710 2445.32,4710 ; v2(2400.55,4769.01) v2(2400.55,4797.01) 2438.54,4797.01 2438.54,4716.77 2445.32,4710
  Bottom Layer w50: 2771.5,4927.01 2871.5,4927.01 2971.5,4927.01 3071.5,4927.01
  other v1: 3810,1455 3860,1455 3910,1455 3960,1455 4010,1455 3810,1495 3860,1495 3910,1495 3960,1495 4010,1495 3810,1535 3860,1535 3910,1535 3960,1535 4010,1535 3810,1575 3860,1575 3910,1575 3960,1575 4010,1575 3810,1850 3860,1850 3910,1850 3960,1850 4010,1850 3810,1890 3860,1890 3910,1890 3960,1890 4010,1890 3810,1930 3860,1930 3910,1930 3960,1930 4010,1930 3810,1970 3860,1970 3910,1970 3960,1970 4010,1970 3810,2245 3860,2245 3910,2245 3960,2245 4010,2245 3810,2285 3860,2285 3910,2285 3960,2285 4010,2285 3810,2325 3860,2325 3910,2325 3960,2325 4010,2325 3810,2365 3860,2365 3910,2365 3960,2365 4010,2365 3810,2640 3860,2640 3910,2640 3960,2640 4010,2640 3810,2680 3860,2680 3910,2680 3960,2680 4010,2680 3810,2720 3860,2720 3910,2720 3960,2720 4010,2720 3810,2760 3860,2760 3910,2760 3960,2760 4010,2760
  other v2: 4360,1945 4385,1945 4410,1945 4360,1970 4385,1970 4410,1970 4360,1995 4385,1995 4410,1995 2150,2225 2172.5,2225 2195,2225 2150,2245 2172.5,2245 2195,2245 2150,2265 2172.5,2265 2195,2265 2595,2575 2620,2575 2645,2575 2670,2575 2695,2575 3970.55,3467.01 3995.55,3467.01 2075.55,3774.76 2180.55,3774.76 3728.03,3850.98 3160.55,4222.01 3205.55,4222.01 3250.55,4222.01 3205.55,4257.01 3250.55,4257.01 2680.55,4264.51 2680.55,4287.01 2665.55,4332.01 2665.55,4357.01 2665.55,4382.01 4265.55,4429.76 3255.55,4632.01 3255.55,4667.01 3255.55,4777.01 3255.55,4812.01

## Polygon pours and split planes (outlines as drawn)
no net on Bottom Layer "Keep-Out Layer-No Net" (solid, remove dead copper, pour order 39): 4380,1930 4065,1930 4020,1930 4020,2015 4390,2015 4425,2015 4425,1930
no net on Bottom Layer "Keep-Out Layer-No Net" (solid, remove dead copper, pour order 37): 3740,1115 3740,1315 3260,1315 3245,1315 3245,1145 3245,1115 3430,1115
no net on Bottom Layer "Keep-Out Layer-No Net" (solid, remove dead copper, pour order 35): 2225,2265 2225,1920 2325,1920 2385,1920 2385,2265
no net on Bottom Layer "Keep-Out Layer-No Net" (solid, remove dead copper, pour order 34): 2325,2215 2325,2820 2720,2820 2720,2330 2720,2215 2710,2215
no net on Bottom Layer "Keep-Out Layer-No Net" (solid, remove dead copper, pour order 27): 3020,1920 2325,1920 2325,2215 2225,2215 2225,2265 3410,2265 3410,1915
no net on Bottom Layer "Keep-Out Layer-No Net" (solid, remove dead copper, pour order 26): 4070,2810 3770,2810 3765,2815 3680,2815 3330,2815 3330,2010 3330,2005 3635,2005 3635,2590 4070,2590
no net on Bottom Layer "Keep-Out Layer-No Net" (solid, remove dead copper, pour order 25): 3210,1095 3210,1475 3495,1760 3535,1800 4070,1800 4070,2020 3770,2020 3120,2020 3020,1920 3020,1095
no net on Bottom Layer "Keep-Out Layer-No Net" (solid, remove dead copper, pour order 32): 2225,1920 2135,1920 2135,2220 2135,2275 2325,2275 2330,2275 2330,1920
no net on Bottom Layer "Keep-Out Layer-No Net" (solid, remove dead copper, pour order 40): 4460,1095 4460,2915 3960,2915 2019.06,2915 2019.06,2535 2019.06,1095 2835,1095
no net on Bottom Layer "Keep-Out Layer-No Net" (solid, remove dead copper, pour order 48): 3866.5,3252.01 4070.55,3252.01 4070.55,3607.01 4070.55,3817.01 4105.55,3817.01 4376.5,3817.01 4376.5,5022.01 4255.55,5022.01 3125.55,5022.01 3125.55,4767.01 2720.55,4767.01 2720.55,4877.01 2675.55,4877.01 2440.55,4877.01 2440.55,4642.01 2440.55,4627.01 2350.55,4627.01 2275.55,4627.01 2275.55,4802.01 2275.55,5022.01 2085.55,5022.01 2011.5,5022.01 2011.5,4867.01 2011.5,3252.01 2575.55,3252.01 2696.5,3252.01 2696.5,3627.01 2696.5,3662.01 3365.55,3662.01 3866.5,3662.01 3866.5,3382.01
no net on Bottom Layer "Keep-Out Layer-No Net" (solid, pour order 47): 4376.5,3252.01 3866.5,3252.01 3866.5,3467.01 4375.55,3467.01
no net on Top Layer "Keep-Out Layer-No Net" (solid, remove dead copper, pour order 38): 4400,2695 4345,2695 4345,2750 4345,2785 4075,2785 3995,2785 3995,2810 4420,2810 4425,2810 4425,2695
no net on Top Layer "Keep-Out Layer-No Net" (solid, remove dead copper, pour order 36): 3500,1115 3245,1115 3245,1270 3245,1315 3530,1315 3740,1315 3740,1115
no net on Top Layer "Keep-Out Layer-No Net" (solid, remove dead copper, pour order 33): 4390,1550 3985,1550 3985,1565 3985,1765 4390,1765
no net on Top Layer "Keep-Out Layer-No Net" (solid, remove dead copper, pour order 31): 4390,2310 4045,2310 4055,2310 4055,2560 4390,2560
no net on Top Layer "Keep-Out Layer-No Net" (solid, pour order 30): 3770,2470 3590,2470 3590,2510 3590,2503.33 3810,2503.33 3810,2470
no net on Top Layer "Keep-Out Layer-No Net" (solid, remove dead copper, pour order 29): 4075,2195 3770,2195 3770,2415 3770,2500 3590,2500 3590,2640 3590,2645 3680,2645 3690,2645 3690,2590 3690,2560 4065,2560
no net on Top Layer "Keep-Out Layer-No Net" (solid, remove dead copper, pour order 28): 4075,1405 3770,1405 3770,1625 3770,1685 3590,1685 3590,1855 3690,1855 3690,1765 4075,1765
no net on Top Layer "Keep-Out Layer-No Net" (solid, remove dead copper, pour order 41): 2019.06,2915 4460,2915 4460,2125 4460,1095 3310,1095 2019.06,1095 2019.06,1885
no net on Top Layer "Keep-Out Layer-No Net" (solid, remove dead copper, pour order 46): 3866.5,3252.01 4070.55,3252.01 4070.55,3742.01 4070.55,3817.01 4376.5,3817.01 4376.5,5022.01 3125.55,5022.01 3125.55,4767.01 2765.55,4767.01 2720.55,4767.01 2720.55,4877.01 2445.55,4877.01 2440.55,4877.01 2440.55,4627.01 2295.55,4627.01 2275.55,4627.01 2275.55,4907.01 2275.55,5022.01 2250.55,5022.01 2011.5,5022.01 2011.5,3892.01 2010.55,3892.01 2600.55,3892.01 2600.55,3812.01 2600.55,3567.01 2300.55,3567.01 2300.55,3892.01 2305.55,3892.01 2011.5,3892.01 2011.5,3252.01 2696.5,3252.01 2696.5,3662.01 3866.5,3662.01
no net on Top Layer "Keep-Out Layer-No Net" (solid, remove dead copper, pour order 45): 4376.5,3252.01 3865.55,3252.01 3865.55,3467.01 4376.5,3467.01
no net on Top Layer "Keep-Out Layer-No Net" (solid, pour order 44): 3860.55,4102.01 3365.55,4102.01 3365.55,4602.01 3865.55,4602.01
no net on Top Layer "Keep-Out Layer-No Net" (solid, remove dead copper, pour order 43): 4280.55,3677.01 4220.55,3617.01 4085.55,3617.01 4075.55,3627.01 4075.55,3687.01 4085.55,3697.01 4185.55,3797.01 4280.55,3797.01
no net on Top Layer "Keep-Out Layer-No Net" (solid, remove dead copper, pour order 42): 4280.55,3477.01 4130.55,3477.01 4085.55,3522.01 4080.55,3527.01 4080.55,3547.01 4080.55,3587.01 4090.55,3597.01 4110.55,3597.01 4280.55,3597.01

## Keep-outs
Keep-Out Layer:
  lines w10: 2011.5,3252.01 2011.5,5022.01 ; 2011.5,5022.01 4376.5,5022.01 4376.5,3252.01 4376.5,2915 4460,2915 4460,1085 2011.5,1085 2011.5,5022.01 ; 2696.5,3252.01 3866.5,3252.01 3866.5,3662.01 2696.5,3662.01 2696.5,3252.01

## Other copper
Top Layer:
  rectangle: 3879.75,3240 4365,3265.26
  rectangle: 2685,2900 4365,3240
  rectangle: 2024.75,2900 2685,3265.26
  text "李锐戈" at 2085.55,4677.01 h50 r270
  text "武汉理工大学" at 2175.55,4677.01 h50 r270
  text "张艳松" at 2130.55,4672.01 h50 r270
  text "2016" at 2085.55,4512.01 h50 r270
  text "袁佳威" at 2130.55,4512.01 h50 r270
  text "2016" at 2395,2635 h50 r180
  text "李锐戈" at 2560,2635 h50 r180
  text "袁佳威" at 2395,2590 h50 r180
  text "张艳松" at 2555,2590 h50 r180
  text "武汉理工大学" at 2560,2545 h50 r180
Bottom Layer:
  rectangle: 3879.75,3240 4365,3265.26
  rectangle: 2685,2900 4365,3240
  rectangle: 2024.75,2900 2685,3265.26

## Silkscreen, mask and mechanical layers (free items; w line width, h text height)
Top Overlay:
  text "0R" at 2685.55,4792.01 h50 r270
  text "LED_B" at 4175.55,4672.01 h50 r270
  text "6K" at 4115.55,4077.01 h50 r270
  text "10K" at 2320.55,4017.01 h50 r270
  text "10K" at 2555.55,4017.01 h50 r270
  text "4K" at 4115.55,3982.01 h50 r270
  text "1nF" at 3910.55,3837.01 h50 r270
  text "10uF" at 2170.55,3832.01 h50 r180
  text "LED_W" at 3110.55,3767.01 h50 r180
  text "104" at 2200.55,3662.01 h50 r90
  text "104" at 4060.55,3397.01 h50 r180
  text "LED_R" at 2575,2875 h50 r180
  text "1.5uF" at 3350,2780 h50 r180
  text "20R" at 3515,2640 h50 r180
  text ">" at 4320,2585 h50 r90
  text ">" at 3055,2570 h50 r90
  text "D" at 3050,2550 h50 r180
  text "10K" at 2885,2530 h50 r270
  text ">" at 3055,2480 h50 r90
  text "1.2K" at 2545,2385 h50 r180
  text "10K" at 2730,2385 h50 r180
  text "0.22R" at 2300,2335 h50 r270
  text "470pF" at 2875,2255 h50 r180
  text ">" at 2940,2255 h50 r90
  text "20R" at 3515,2255 h50 r180
  text "10uF" at 2075,2235 h50 r270
  text ">" at 4329.3,2212.45 h78.74 r90
  text "10uF" at 3325,2210 h50 r180
  text "D" at 4319.65,2198.72 h50 r90
  text "D" at 2930,2120 h50 r180
  text "180R" at 2275,2065 h50 r270
  text "10uF" at 3080,1995 h50 r180
  text "1.5uF" at 3345,1995 h50 r180
  text "20R" at 3520,1995 h50 r180
  text ">" at 2940,1950 h50 r90
  text ">" at 4315,1890 h50 r90
  text ">" at 3055,1765 h50 r90
  text "D" at 3055,1710 h50 r90
  text ">" at 3055,1670 h50 r90
  text ">" at 4329.65,1668.72 h78.74 r90
  text "D" at 4320,1655 h50 r90
  text "10K" at 3010,1535 h50 r270
  text ">" at 4310,1495 h50 r90
  text "20R" at 3520,1465 h50 r180
  text "10uF" at 3330,1435 h50 r180
  text "10K" at 2835,1275 h50 r270
Bottom Overlay:
  text "104" at 4060.55,4922.01 h50 r270
  text "104" at 3185.55,4867.01 h50 r270
  text "10K" at 4060.55,4807.01 h50 r270
  text "F" at 2245.55,4737.01 h50 r180
  text "C" at 2650.55,4737.01 h50
  text "103" at 4120.55,4622.01 h50 r270
  text "104" at 3665.55,4572.01 h50 r180
  text "103" at 3750.55,4572.01 h50 r180
  text "10uH" at 3840.55,4572.01 h50 r180
  text "10uH" at 4120.55,4507.01 h50 r270
  text "10K" at 3420.55,4412.01 h50 r180
  text "104" at 4120.55,4412.01 h50 r270
  text "C" at 2595.55,4282.01 h50
  text ">" at 2615.55,4037.01 h50 r270
  text ">" at 3880.55,3967.01 h50 r270
  text "C" at 3055.55,3942.01 h50 r180
  text "F" at 2815.55,3937.01 h50 r180
  text "C" at 2925.55,3937.01 h50 r180
  text "D" at 3885.55,3937.01 h50 r180
  text "D" at 2695.55,3912.01 h50 r180
  text "C" at 3680.55,3877.01 h50 r180
  text "C" at 3565.55,3872.01 h50 r180
  text "10K" at 2100.55,3737.01 h50 r180
Mechanical 1:
  text "此处挖去" at 2900,3385 h200
Mechanical 15:
  lines w10: 2060,1095 2060,2866.65 4425,2866.65 4425,1095 4380,1095 3915,1095 3915,1507.2 2744.41,1507.2 2744.41,1095 2060,1095

## Text inside footprints (layer, text, board x,y; h text height)
C2: Top Overlay "+" at 2662.51,2505.05 h47.24
L1: Top Overlay "+" at 2405.21,1544.07 h78.74
P8: Top Overlay "1" at 2195.55,3907.01 h50 r90; Top Overlay "2" at 2095.55,3887.01 h50 r90; Top Overlay "5" at 2195.55,4247.01 h50 r90; Top Overlay "6" at 2095.55,4247.01 h50 r90